# Altium PCB PCB2.PcbDoc
Units mil, origin at the board's own origin, x right, y up, seen from the top; angles counter-clockwise.
Board outline 3210 x 3525 mil, 2 copper layers (SIG, GND); 28 components, 20 nets, 73 pads, 15 vias.
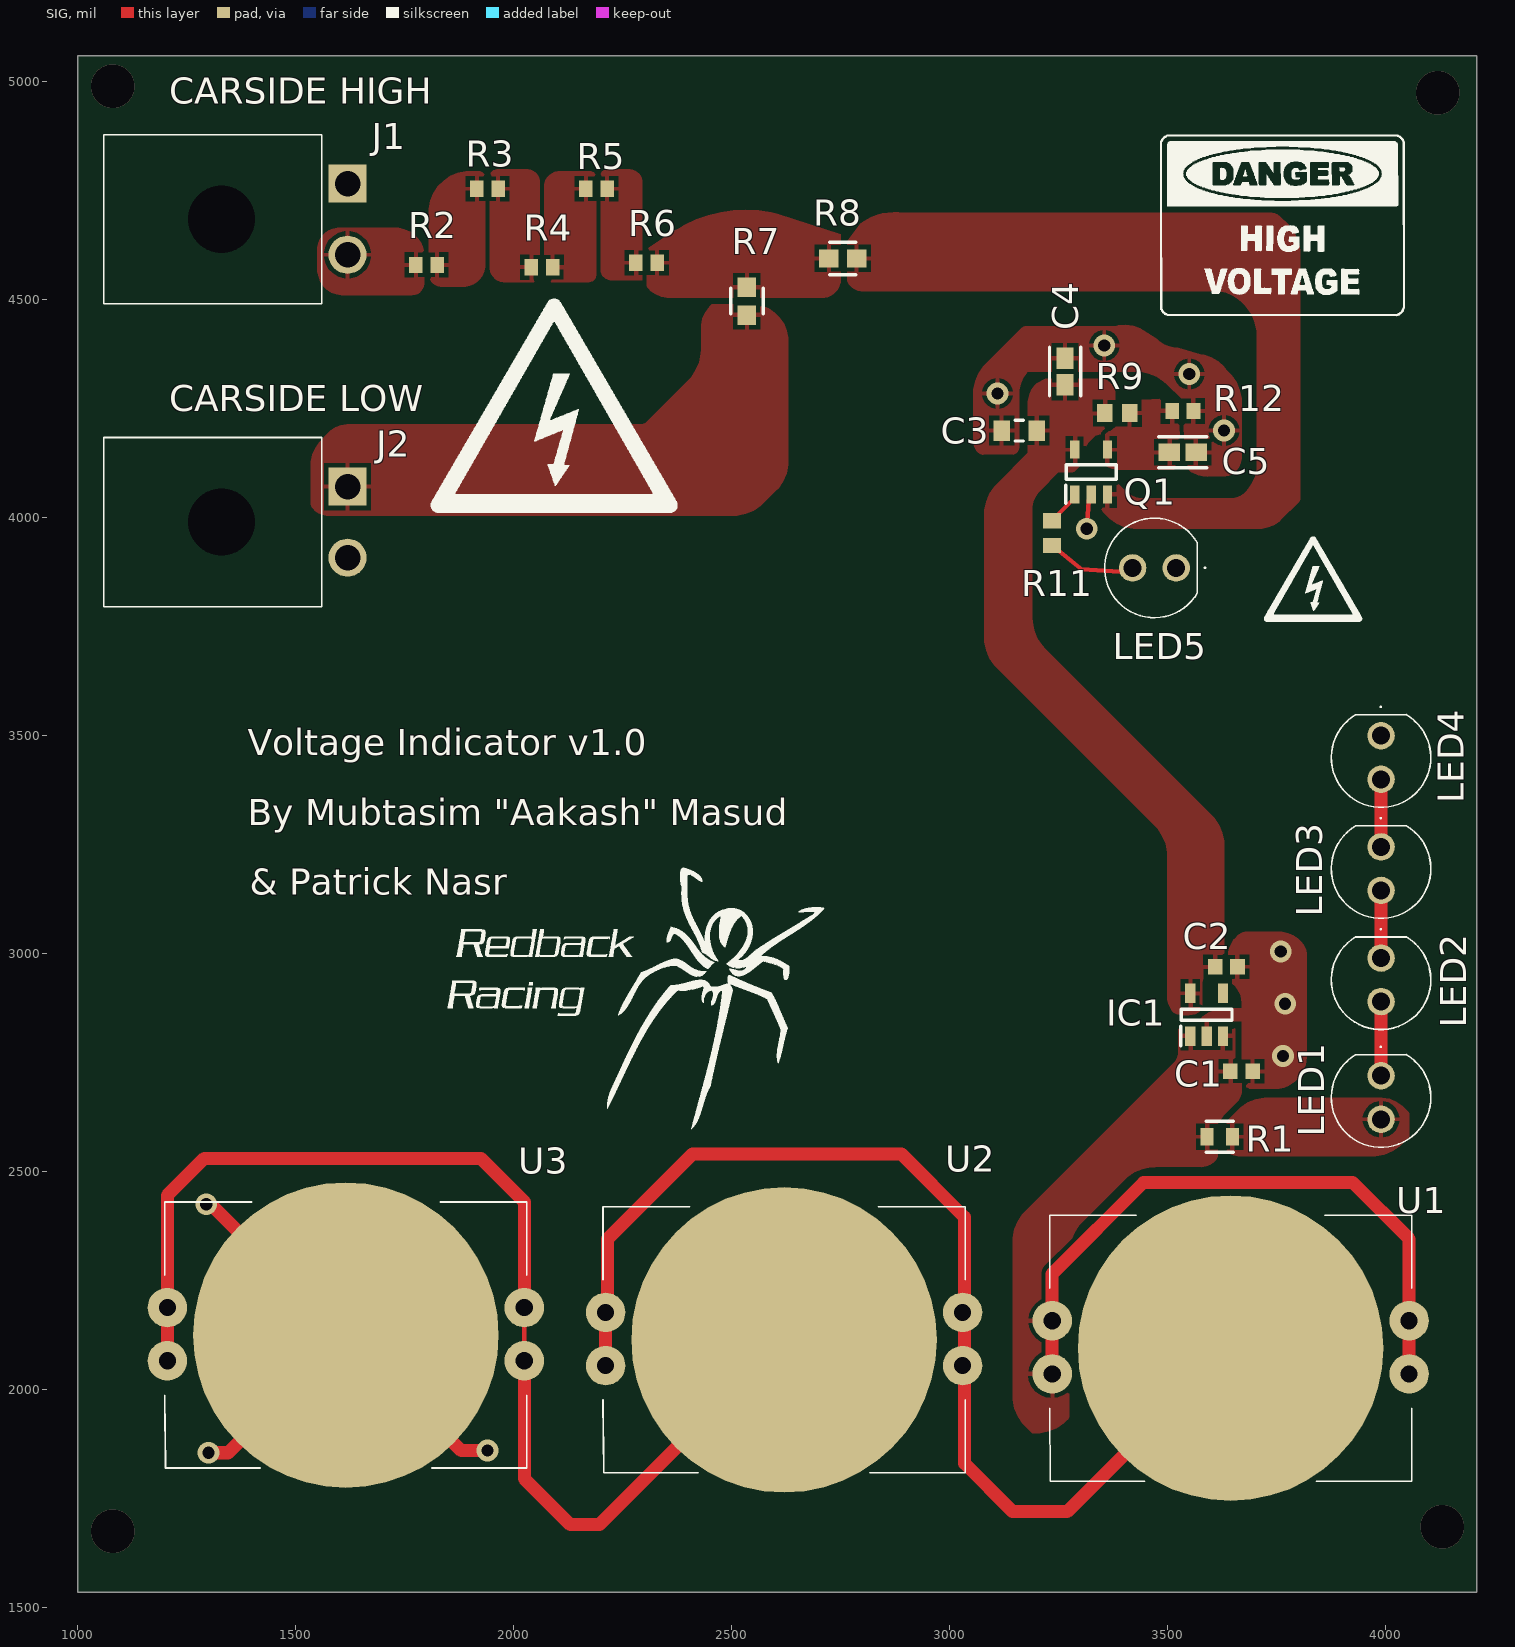
[diagram p0: SIG view]
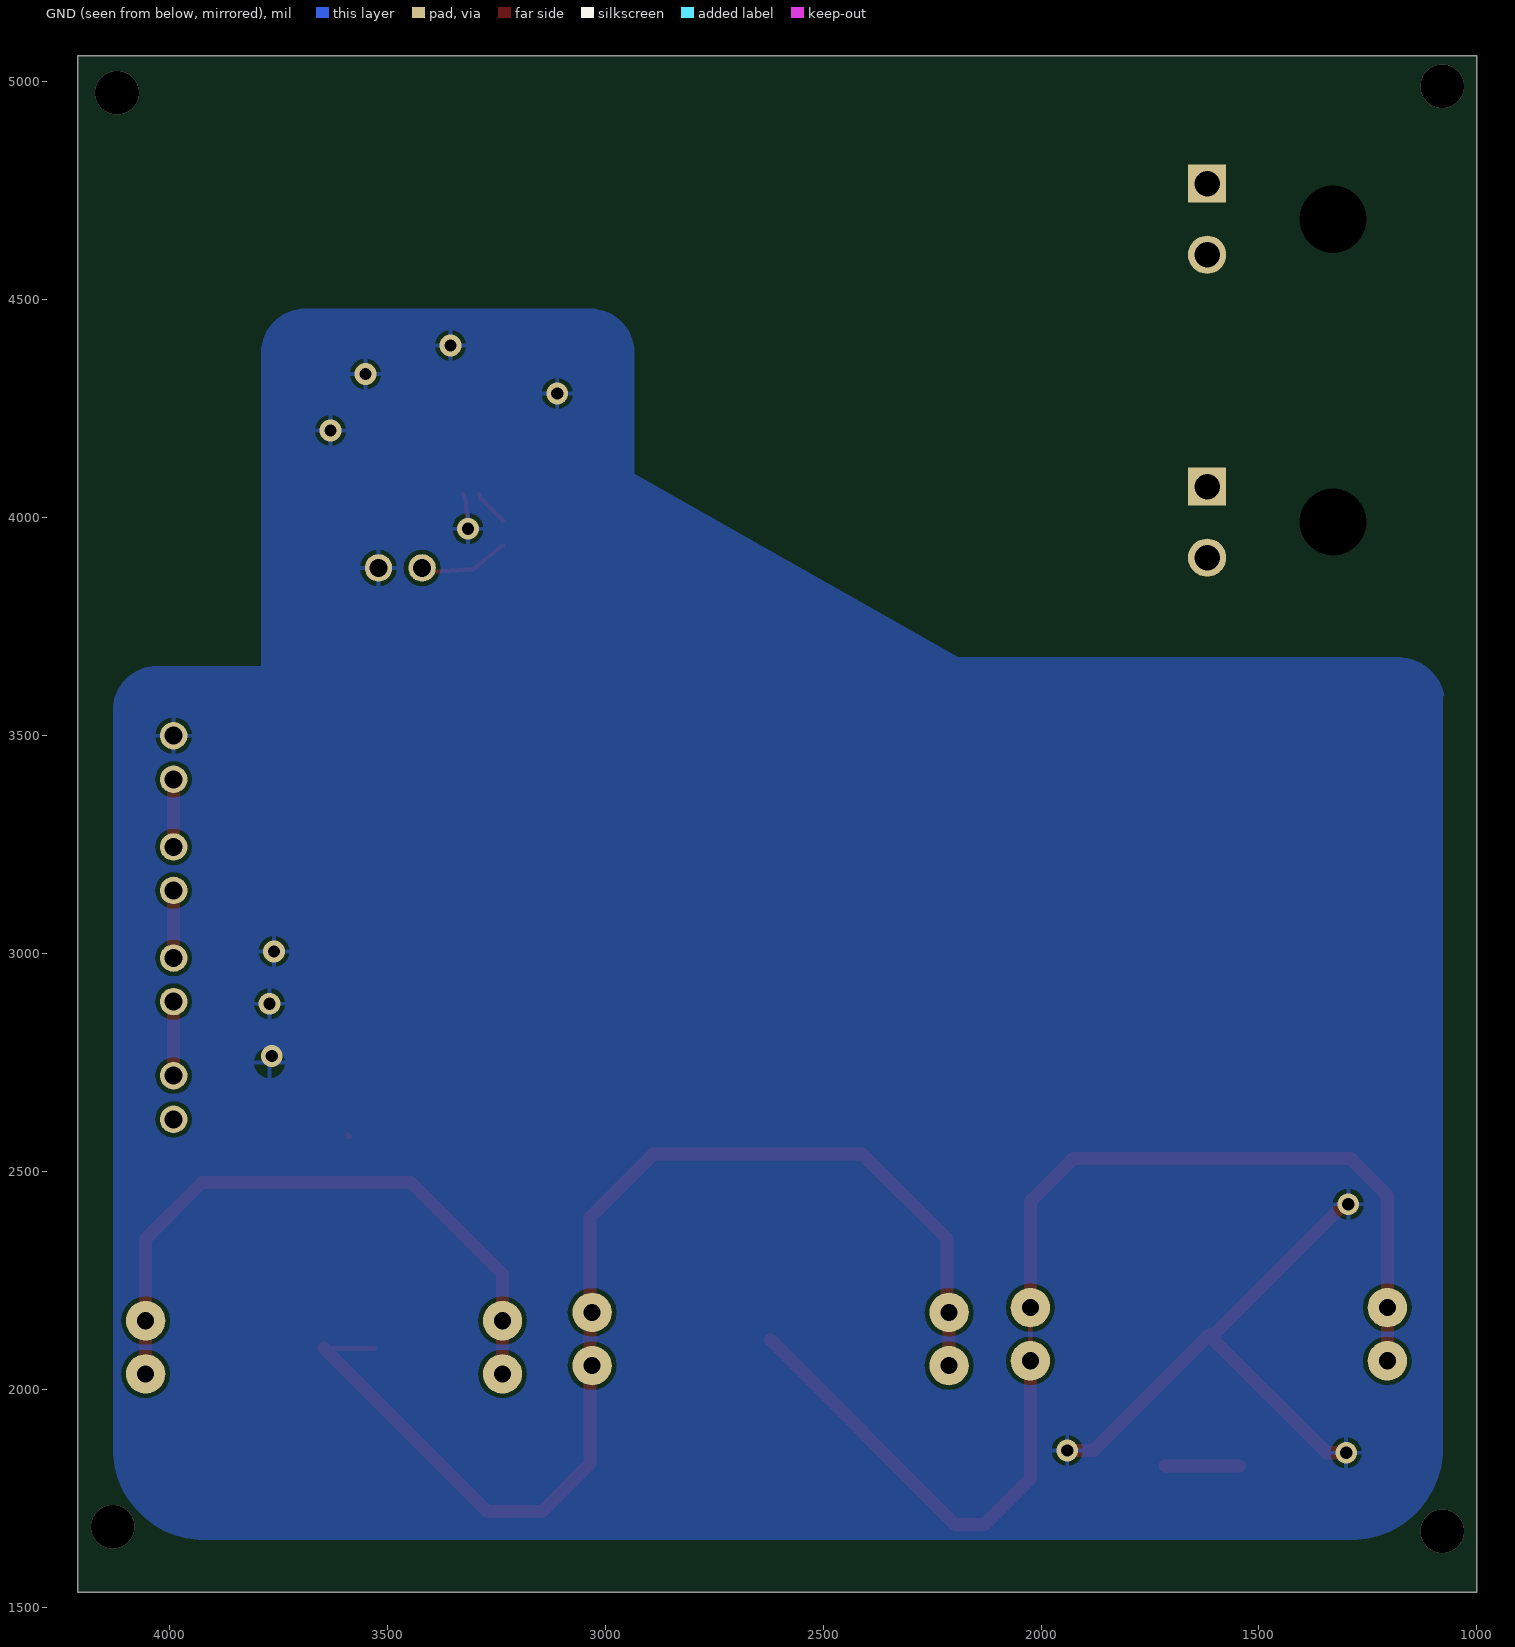
[diagram p1: GND view, seen from below]

## Layer stack, top to bottom
Top Solder: solder mask 0.4, Solder Resist, Dk 3.5
SIG: signal copper 1.4
Dielectric 1: dielectric 12.6, FR-4, Dk 4.8
GND: signal copper 1.4
Bottom Solder: solder mask 0.4, Solder Resist, Dk 3.5

## Board outline
1000,1535 4210,1535 4210,5060 1000,5060

## Design rules (kind name [scope] priority, off if disabled: settings)
Clearance [All] p1: gap=10 ignorepadtopadclearanceinfootprint=FALSE except(0: Arc-Hole Track-Hole SMDPad-Hole THPad-Hole Via-Hole Fill-Hole Poly-Hole Region-Hole Text-Hole)
PolygonConnect [All] p1: connectstyle=Relief reliefconductorwidth=10 reliefentries=4 polygonreliefangle="90 Angle" airgapwidth=10
RoutingVias [All] p1: holewidth=28 width=50 viastyle="Through Hole" minholewidth=28 minwidth=50 maxholewidth=28 maxwidth=50
SolderMaskExpansion [All] p1: expansion=4 istentingtop=FALSE
Width [All] p1: maxlimit=30 minlimit=10 preferedwidth=10
30 further rules are at their usual default settings.

## Components (designator, comment, footprint, x,y, rotation, side; value= is the part's Value field where it differs from the comment)
C1 "1uF" CAPC1608X90X35LL15T15 3670,2730 r180 top
C2 "1uF" CAPC1608X90X35LL15T15 3635,2970 r180 top
C3 "" FP-CGA3E-0_3-0_1-IPC_A 3160,4200 r0 top
C4 "" FP-0603-L_1_6_0_1-W_0_8_0-IPC_A 3265,4335.6 r270 top
C5 "" FP-0603-L_1_6_0_1-W_0_8_0-IPC_A 3535,4150 r0 top
IC1 "LD2980CM50TR" SOT95P280X145-5N 3590,2860 r90 top
J1 "1-770966-1" 17709661 1618.98,4766.5 r270 top
J2 "1-770966-1" 17709661 1618.98,4071.5 r270 top
LED1 "" C503B-BCN 3990,2670 r90 top
LED2 "" C503B-BCN 3990,2940 r90 top
LED3 "" C503B-BCN 3990,3195 r90 top
LED4 "" C503B-BCN 3990,3450 r90 top
LED5 "red led" C503B-BCN 3470,3885 r0 top
Q1 "LT1716CS5#PBF" SOT95P280X100-5N 3325,4105 r90 top
R1 "680" FP-CRCW0603-e3-MFG 3620,2580 r180 top
R2 "120k" RESC1609X50X30NL10T20 1800,4580 r180 top
R3 "120k" RESC1609X50X30NL10T20 1940,4755 r180 top
R4 "120k" RESC1609X50X30NL10T20 2065,4575 r180 top
R5 "120k" RESC1609X50X30NL10T20 2190,4755 r180 top
R6 "120k" RESC1609X50X30NL10T20 2305,4585 r180 top
R7 "12k" FP-CRCW0603-e3-IPC_A 2535,4497.1 r90 top
R8 "12k" FP-CRCW0603-e3-IPC_A 2755,4595 r0 top
R9 "2k" RESC1608X55X30ML15T15 3385,4240 r0 top
R11 "680" RESC1608X55X30ML15T15 3235,3965 r90 top
R12 "CRCW06032K80FKEA" RESC1609X50X30NL10T20 3535.39,4245 r180 top
U1 "BAT-HLD-001-THM" BATHLD001THM 3645,2095 r180 top
U2 "BAT-HLD-001-THM" BATHLD001THM 2620.55,2114.06 r180 top
U3 "BAT-HLD-001-THM" BATHLD001THM 1615,2125 r180 top

## Footprints (in the part's own frame and the unit in brackets; to place one, negate y for a bottom-side part, rotate by r counter-clockwise, add the part's x,y. Pads: shape width x height; smd on the part's side, far side on the other; paste and mask are expansions set on the pad)
17709661 [mm]
  rect 2.22x2.22 hole 1.48: 1(0,0)
  round 2.22 hole 1.48: 2(4.14,0)
  round 1.955 hole 3.91 unplated: 3(2.07,-7.34)
  silkscreen extent -2.86,-14.2 7,-1.5, body extent -3.5,-14.33 7.65,0.38, height 7.63
BATHLD001THM [mm]
  round 2.3 hole 1: 1(-10.4,1.5) 2(-10.4,-1.6) 3(10.4,-1.6) 4(10.4,1.5)
  round 17.8 smd: 5(0,0)
  silkscreen extent -10.55,-7.75 10.55,7.75, body extent -10.54,-7.85 10.54,7.98, height 4.29
C503B-BCN [mm]
  round 1.6 hole 1.05: 1(1.27,0) 2(-1.27,0)
  silkscreen extent -2.9,-2.9 2.98,2.9
CAPC1608X90X35LL15T15 [mm] "Chip Capacitor, 2-Leads, Body 1.60x0.81mm, IPC High Density"
  rect 0.85x0.9 smd: 1(-0.65,0) 2(0.65,0)
  body extent -0.88,-0.48 0.87,0.48, height 0.9
FP-0603-L_1_6_0_1-W_0_8_0-IPC_A [mil]
  rect 49.52x39.85 smd paste+0 mask+0: 1(-30.6,0) 2(30.6,0)
  silkscreen extent -55,-36 55,36, body extent -75,-40 75,40, height 10
FP-CGA3E-0_3-0_1-IPC_A [mm]
  rect 0.956x1.206 smd paste+0 mask+0: 1(-1.025,0) 2(1.025,0)
  silkscreen extent -0.25,-0.6 0.25,0.6, body extent -2,-1.1 2,1.1, height 0.25
FP-CRCW0603-e3-IPC_A [mil]
  rect 44.69x41.82 smd paste+0 mask+0: 1(-32.1,0) 2(32.1,0)
  silkscreen extent -30,-37 30,37, body extent -74,-41 74,41, height 10
FP-CRCW0603-e3-MFG [mm]
  rect 0.75x1 smd paste+0 mask+0: 1(-0.75,0) 2(0.75,0)
  silkscreen extent -0.8,-0.9 0.8,0.9, body extent -1.22,-0.6 1.22,0.6, height 0.25
RESC1608X55X30ML15T15 [mm] "Chip Resistor, 2-Leads, Body 1.60x0.80mm, IPC Low Density"
  rect 0.9x1.05 smd: 1(-0.725,0) 2(0.725,0)
  body extent -0.87,-0.48 0.87,0.48, height 0.55
RESC1609X50X30NL10T20 [mm] "Chip Resistor, 2-Leads, Body 1.55x0.85mm, IPC Medium Density"
  rect 0.8x0.95 smd: 1(-0.625,0) 2(0.625,0)
  body extent -0.82,-0.48 0.82,0.48, height 0.5
SOT95P280X100-5N [mm]
  rect 1.05x0.55 smd: 1(-1.3,0.95) 2(-1.3,0) 3(-1.3,-0.95) 4(1.3,-0.95) 5(1.3,0.95)
  silkscreen extent -1.83,-1.45 0.43,1.48, body extent -1.4,-1.45 1.4,1.45, height 1
SOT95P280X145-5N [mm]
  rect 1.15x0.6 smd: 1(-1.25,0.95) 2(-1.25,0) 3(-1.25,-0.95) 4(1.25,-0.95) 5(1.25,0.95)
  silkscreen extent -1.83,-1.48 0.33,1.5, body extent -1.4,-1.48 1.4,1.48, height 1.45

## Part data
C1 C2: library part CMP-2006-02298-2, Manufacturer=Kemet, Part Number=C0603C105K4RACTU
C3: library part CMP-2000-07546-2, "Cap Ceramic 100nF 50V X7R 10% Pad SMD 0603 +125°C Automotive T/R", Capacitance=100nF, Case Code (Imperial)=0603, Case Code (Metric)=1608, Dielectric=X7R, Max Operating Temperature=125°C, Min Operating Temperature=-55°C, Package Quantity=1, Ratings=AEC-Q200, Tolerance=10%, Voltage=50V, Case/Package=0603, Composition=Ceramic, Depth=0.8mm, Height=0.8mm, Lead Free="Lead Free", Length=1.6mm, Mount="Surface Mount", Packaging="Tape and Reel", Radiation Hardening=No, REACH SVHC="No SVHC", Termination=SMD/SMT, Thickness=0.035inch, Voltage Rating=50V, Voltage Rating (DC)=50V, Weight=7.1E-05oz, Width=0.8mm
C4 C5: library part CMP-2000-05447-3, "None", Capacitance=1uF, Case Code (Imperial)=0603, Case Code (Metric)=1608, Dielectric=X5R, Max Operating Temperature=85°C, Min Operating Temperature=-55°C, Package Quantity=1, Tolerance=10%, Voltage Rating=50V, Case/Package=0603, Construction=Flat, Contact Plating=Nickel, Depth=0.8mm, Halogen Free="Halogen Free", Height=0.8mm, Length=1.6mm, Mount="Surface Mount", Number of Pins=2, Packaging="Tape and Reel", Radiation Hardening=No, RoHS Compliant=Yes, Series=M, Termination=SMD/SMT, Thickness=0.035inch, Voltage Rating (DC)=50V, Width=0.031inch
IC1: "Integrated Circuit", Manufacturer_Name=STMicroelectronics, Mouser Part Number=511-LD2980CM50, Arrow Part Number=LD2980CM50TR, Arrow Price/Stock=https://www.arrow.com/en/products/ld2980cm50tr/stmicroelectronics?region=nac, Datasheet Link=http://www.st.com/st-web-ui/static/active/en/resource/technical/document/datasheet/CD00001636.pdf, Height=1.45mm, Manufacturer_Part_Number=LD2980CM50TR, Mouser Price/Stock=https://www.mouser.co.uk/ProductDetail/STMicroelectronics/LD2980CM50TR?qs=fUp1KqWiDeH%252BLPcpxdfyeg%3D%3D
J1 J2: "Connector", Manufacturer_Name="TE Connectivity", Mouser Part Number=571-1-770966-1, Arrow Part Number=1-770966-1, Arrow Price/Stock=https://www.arrow.com/en/products/1-770966-1/te-connectivity?region=europe, Datasheet Link=https://www.te.com/commerce/DocumentDelivery/DDEController?Action=showdoc&DocId=Customer+Drawing%7F770966%7FG1%7Fpdf%7FEnglish%7FENG_CD_770966_G1.pdf%7F1-770966-1, Height=7.77mm, Manufacturer_Part_Number=1-770966-1, Mouser Price/Stock=https://www.mouser.co.uk/ProductDetail/TE-Connectivity-AMP/1-770966-1?qs=zthB9rB9njD9XGaVaokK%2Fw%3D%3D
LED1 LED2 LED3 LED4 LED5: library part C503B-GAS-CB0F0792, "LED", Manufacturer_Name=Wolfspeed, Mouser Part Number=941-C503BGASCB0F0792, Arrow Part Number=C503B-GAS-CB0F0792, Arrow Price/Stock=https://www.arrow.com/en/products/c503b-gas-cb0f0792/cree, Datasheet Link=https://www.cree.com/led-components/media/documents/1300-C503B-BAS-BAN-GAS-GAN.pdf, Manufacturer_Part_Number=C503B-GAS-CB0F0792, Mouser Price/Stock=https://www.mouser.com/Search/Refine.aspx?Keyword=941-C503BGASCB0F0792
Q1: "Transistor", Manufacturer_Name="Analog Devices", Mouser Part Number=584-LT1716CS5#PBF, Datasheet Link=https://g.componentsearchengine.com/Datasheets/2/LT1716CS5#PBF.pdf, Height=1mm, Manufacturer_Part_Number=LT1716CS5#PBF, Mouser Price/Stock=https://www.mouser.com/Search/Refine.aspx?Keyword=584-LT1716CS5%23PBF
R1: library part CMP-2000-03529-2, "RES Thick Film, 680Ω, 1%, 0.1W, 100ppm/°C, 0603", Case Code (Imperial)=0603, Case Code (Metric)=1608, Max Operating Temperature=155°C, Max Power Dissipation=100mW, Min Operating Temperature=-55°C, Package Quantity=10, Resistance=680R, Temperature Coefficient=100ppm/°C, Tolerance=1%, Voltage Rating=75V, Case/Package=0603, Composition="Thick Film", Contact Plating=Tin, Depth=0.85mm, Features="Automotive AEC-Q200", Height=0.45mm, Lead Free="Lead Free", Length=1.55mm, Military Standard=Not, Number of Pins=2, Number of Terminations=2, Packaging="Tape and Reel", Power Rating=100mW, Radiation Hardening=No, Termination=SMD/SMT, Voltage Rating (DC)=75V, Weight=7.1E-05oz, Width=0.85mm, Working Voltage=75V
R2 R3 R4 R5 R6: library part CMP-2000-03868-1, Manufacturer="Vishay Dale", Part Number=CRCW0603120KFKEA
R7 R8: library part CMP-2000-03877-2, "RES Thick Film, 12kΩ, 1%, 0.1W, 100ppm/°C, 0603", Case Code (Imperial)=0603, Case Code (Metric)=1608, Max Operating Temperature=155°C, Max Power Dissipation=100mW, Min Operating Temperature=-55°C, Package Quantity=10, Resistance=12kR, Temperature Coefficient=100ppm/°C, Tolerance=1%, Voltage Rating=75V, Case/Package=0603, Composition="Thick Film", Contact Plating=Tin, Depth=0.85mm, Features="Automotive AEC-Q200", Height=0.45mm, Lead Free="Lead Free", Length=1.55mm, Military Standard=Not, Mount="Surface Mount", Number of Terminations=2, Packaging="Tape and Reel", Power Rating=100mW, Radiation Hardening=No, Termination=SMD/SMT, Voltage Rating (DC)=75V, Weight=7.1E-05oz, Width=0.033inch
R9 R11: library part CMP-2000-00317-1, Manufacturer=Panasonic, Part Number=ERJ-3EKF2001V
R12: library part CMP-2000-03186-1, Manufacturer="Vishay Dale", Part Number=CRCW06032K80FKEA
U1 U2 U3: "Undefined or Miscellaneous", Manufacturer_Name="Linx Technologies", Height=4.2mm, Manufacturer_Part_Number=BAT-HLD-001-THM

## Via types
v1: diameter 50, hole 28, SIG to GND, 11 vias
v2: diameter 100, hole 100, SIG to GND, 4 vias

## Nets (pads, with @x,y where several pads share a name; then routed paths per layer and width w, separated by ;. In a path a pad name is that pad's centre, name@x,y a point inside that pad or via, vN(x,y) a via of type N, cw(c..) or ccw(c..) an arc to the next point about the centre after c; other vN are vias at no path point)
5V: C2.2 C3.2 C4.2 IC1.5 Q1.5 R9.1
CSH: J1.2 R2.2
GND: C1.1 C2.1 C3.1 C4.1 C5.2 IC1.2 LED4.1 LED5.1 Q1.2 R12.1 U3.5 | length 1555.9
  SIG w10: v1(1295,2425) v1@1305,2425 ; U3.5@1605,2125 U3.5 ; v1(3315,3975) 3319.17,4038.15 Q1.2
  SIG w30: v1(1300,1855) 1345,1855 U3.5 1880,1860 v1(1940,1860) ; v1@1305,2425 U3.5@1605,2125 ; U3.5@1545,1825 U3.5@1715,1825
  other v1: 3765,2765 3770,2885 3760,3005 3630,4200 3110,4285 3550,4330 3355,4395
NetC1_2: C1.2 IC1.1 IC1.3 R1.2 U1.1 U1.2 U1.3 U1.4 | length 1522.8
  SIG w10: U1.4@3235,2030 3235,2035.39 U1.4 ; R1.2@3585.55,2580 3590.47,2584.92 R1.2 ; U1.1@4050,2031.5 U1.1
  SIG w30: U1.4 U1.3 3235.55,2265.55 3445,2475 3925,2475 4054.45,2345.55 U1.2 U1.1
NetC5_1: C5.1 Q1.4 R9.2 R12.2
NetJ2_1: J2.1 R7.1
NetLED1_1: LED1.1 LED2.2 | length 178.4
  SIG w10: LED1.1@3987.5,2722.5 LED1.1 ; LED2.2@3987.5,2887.5 3985,2890 cw(c3972.93,2877.93) LED2.2@3990,2877.93
  SIG w30: LED1.1 LED2.2@3990,2877.93
NetLED1_2: LED1.2 R1.1
NetLED2_1: LED2.1 LED3.2 | length 155
  SIG w30: LED2.1 LED3.2
NetLED3_1: LED3.1 LED4.2 | length 155
  SIG w30: LED3.1 LED4.2
NetLED5_2: LED5.2 R11.1 | length 193.8
  SIG w10: R11.1 3299.86,3883.82 3302.35,3881.8 3392.12,3876.38 LED5.2@3392.42,3876.38 ; LED5.2@3392.43,3876.38 3396.22,3876.38 3399.06,3878.9 LED5.2@3405.94,3885
NetQ1_1: Q1.1 R11.2 | length 81.3
  SIG w10: R11.2 3282.17,4040.71 ccw(c3269.06,4053.82) Q1.1
NetQ1_3: Q1.3 R8.2
NetR2_1: R2.1 R3.2
NetR3_1: R3.1 R4.2
NetR4_1: R4.1 R5.2
NetR5_1: R5.1 R6.2
NetR6_1: R6.1 R7.2 R8.1
NetU1_5: U1.5 U2.1 U2.2 U2.3 U2.4 | length 2732.3
  SIG w10: U1.5@3528.26,2095 U1.5
  SIG w30: U2.4 U2.3 ; U2.3@2215.55,2187.99 2215.55,2345.55 2410,2540 2890,2540 3034.45,2395.55 3034.45,2177.05 3034.45,2055 3034.45,1830.55 3145,1720 3270,1720 U1.5
NetU2_5: U2.5 U3.1 U3.2 U3.3 U3.4 | length 2725.5
  SIG w10: U3.1 U3.2
  SIG w30: U3.4 U3.3 1205.55,2445.55 1290.39,2530.39 1924.61,2530.39 2024.45,2430.55 U3.2 ; U3.1 2024.45,1795.55 2130,1690 2196.5,1690 U2.5
pads on no net: IC1.4 J1.1 J1.3 J2.2 J2.3
copper on no net:
  other v2: 1080,1675 4130,1685 4120,4975 1080,4990

## Polygon pours and split planes (outlines as drawn)
5V on SIG (solid, pour order 61): 3080,3725.56 ccw(c3180,3725.56) 3109.29,3654.85 3470.71,3293.43 cw(c3400.02,3222.73) 3500,3222.72 3500,2900.36 ccw(c3551.21,2900.35) 3515,2864.14 3514.85,2864.29 ccw(c3542.61,2930.79) 3570,2864.14 ccw(c3555.87,2884.13) 3580,2880 3580,2935 cw(c3597.07,2927.93) 3590,2945 3619.14,2944.14 ccw(c3621.04,2965.78) 3635,2949.14 3635,2977.07 ccw(c3617.95,2977.08) 3630,2989.14 3630,3247.72 ccw(c3530.02,3247.73) 3600.71,3318.43 3219.29,3699.85 cw(c3290,3770.56) 3190,3770.56 3190,4019.14 cw(c3250.35,4019.14) 3207.68,4061.82 3250,4104.14 3277.93,4104.14 ccw(c3277.93,4121.21) 3290,4109.14 3295.86,4115 ccw(c3261.72,4149.14) 3310,4149.14 cw(c3346.21,4149.14) 3320.61,4174.75 3335,4189.14 ccw(c3335,4225.36) 3360.61,4199.75 3375,4214.14 ccw(c3362.94,4226.21) 3380,4226.21 3380,4285 ccw(c3345.88,4285.01) 3370,4309.14 ccw(c3345.87,4285.03) 3345.86,4319.14 3220,4319.14 3200,4309.14 ccw(c3248.27,4260.86) 3180,4260.86 3180,4149.14 3109.29,4078.43 ccw(c3179.99,4007.73) 3080,4007.72
NetLED1_2 on SIG "NETLED1_2_L01_P056" (solid, pour order 56): 3625,2605 3660.71,2640.71 cw(c3731.42,2570) 3731.42,2670 3985,2670 cw(c3985,2585.5) 4044.75,2645.25 4050,2640 cw(c4037.93,2627.93) 4055,2627.93 4055,2580 4039.29,2564.29 cw(c3968.58,2635) 3968.58,2535 3666.21,2535 cw(c3666.21,2586.21) 3630,2550 cw(c3642.07,2562.07) 3625,2562.07
GND on SIG (solid, pour order 55): 3670,2711.04 ccw(c3684.57,2711.04) 3674.27,2700.73 3680,2695 ccw(c3692.07,2707.07) 3692.07,2690 3750,2690 ccw(c3750,2750.35) 3792.68,2707.68 3795,2710 ccw(c3734.65,2770.35) 3820,2770.36 3820,2993.79 ccw(c3768.79,2993.79) 3805,3030 ccw(c3756.72,2981.72) 3756.72,3050 3680,3050 ccw(c3680,3025.86) 3662.93,3042.93 3655,3035 ccw(c3691.21,2998.79) 3640,2998.79 3640,2947.07 ccw(c3657.07,2947.07) 3645,2935 3655,2925 cw(c3618.79,2888.79) 3670,2888.79 3670,2875 3635.36,2875 ccw(c3635.35,2789.65) 3575,2850 ccw(c3587.07,2837.93) 3570,2837.93 3570,2793.91 ccw(c3588.37,2793.91) 3575.38,2780.92 ccw(c3577.6,2783.14) 3577.6,2780 3605,2780 ccw(c3592.93,2792.07) 3610,2792.07 3610,2829.49 cw(c3621.27,2829.49) 3613.3,2837.46 cw(c3626.99,2830.83) 3632.5,2845 3670,2845
NetC1_2 on SIG (solid, pour order 48): 3145,1986.42 ccw(c3245,1986.42) 3174.29,1915.71 3190,1900 3198.58,1900 ccw(c3198.58,2000) 3269.29,1929.29 3270,1930 ccw(c3257.93,1942.07) 3275,1942.07 3275,2313.58 cw(c3375,2313.58) 3304.29,2384.29 3400.71,2480.71 cw(c3471.42,2410) 3471.42,2510 3573.79,2510 ccw(c3573.79,2561.21) 3610,2525 ccw(c3597.93,2537.07) 3615,2537.07 3615,2593.79 cw(c3666.21,2593.79) 3630,2630 3660,2660 ccw(c3635.86,2684.14) 3670,2684.14 3670,2737.93 ccw(c3652.93,2737.93) 3665,2750 ccw(c3652.93,2737.93) 3654.95,2754.88 ccw(c3629.42,2765.58) 3655,2755 3655,2830 ccw(c3631.93,2825.46) 3645,2845 3620,2845 ccw(c3635.61,2824.39) 3610,2827.93 3610,2790 cw(c3597.94,2790) 3606.46,2781.46 3605,2780 3580,2780 cw(c3580,2792.07) 3571.46,2783.54 3570,2785 3570,2822.93 ccw(c3546.94,2825.45) 3565,2840 ccw(c3553.98,2830.45) 3555,2845 3545,2845 ccw(c3542.97,2823.05) 3528.87,2840 3525,2830 3525,2775 cw(c3488.79,2775) 3525,2775 ccw(c3566.22,2772.07) 3524.9,2772.27 cw(c3488.79,2775) 3514.39,2749.39 3174.29,2409.29 ccw(c3245,2338.58) 3145,2338.58
NetQ1_3 on SIG "NETQ1_3_L01_P042" (solid, pour order 42): 2765,4635 2765,4550 ccw(c2789.14,4550) 2772.07,4532.93 2775,4530 ccw(c2799.14,4554.14) 2799.14,4520 3609.64,4520 cw(c3609.65,4434.65) 3670,4495 3675.71,4489.29 cw(c3605,4418.58) 3705,4418.58 3705,4120.36 cw(c3619.65,4120.35) 3680,4060 cw(c3643.79,4096.21) 3643.79,4045 3445,4045 cw(c3445,4105.36) 3402.32,4062.68 3380,4085 ccw(c3367.93,4072.93) 3367.93,4090 3350,4090 ccw(c3362.07,4077.93) 3345,4077.93 3345,4034.14 ccw(c3379.14,4034.14) 3355,4010 3360.71,4004.29 ccw(c3431.42,4075) 3431.42,3975 3710,3975 ccw(c3710,4047.43) 3761.21,3996.21 3800,4035 ccw(c3787.93,4047.07) 3805,4047.07 3805,4603.58 ccw(c3705,4603.58) 3775.71,4674.29 3760,4690 ccw(c3735.86,4665.86) 3735.86,4700 2890,4700 ccw(c2873.53,4572.48) 2795,4674.29
NetR6_1 on SIG "NETR6_1_L01_P016" (solid, pour order 16): 2310,4620 ccw(c2322.06,4607.93) 2305,4607.93 2305,4537.07 ccw(c2322.07,4537.07) 2310,4525 ccw(c2358.28,4573.28) 2358.28,4505 2710,4505 ccw(c2710,4541.21) 2735.61,4515.61 2740,4520 ccw(c2715.87,4544.13) 2750,4544.14 2750,4650 2605,4697.07 ccw(c2531.65,4409.61) 2380.17,4664.69 2370,4660
NetJ2_1 on SIG "NETJ2_1_L01_P037" (solid, pour order 37): 2544.64,4490 cw(c2544.64,4404.64) 2605,4465 cw(c2544.64,4404.64) 2630,4404.64 2630,4131.42 cw(c2530,4131.42) 2600.71,4060.71 2574.29,4034.29 cw(c2503.58,4105) 2503.58,4005 1575,4005 cw(c1575,4053.28) 1540.86,4019.14 1540,4020 cw(c1552.07,4032.07) 1535,4032.07 1535,4120 cw(c1619.5,4120) 1559.75,4179.75 1575,4195 cw(c1623.28,4146.72) 1623.28,4215 2292.93,4215 ccw(c2292.93,4232.07) 2305,4220 2400.71,4315.71 ccw(c2330,4386.42) 2430,4386.42 2430,4435 cw(c2502.43,4435) 2451.21,4486.21 2455,4490
NetR5_1 on SIG "NETR5_1_L01_P030" (solid, pour order 30): 2200,4570 ccw(c2225,4570) 2225,4545 2295,4545 2295,4770 ccw(c2265,4770) 2265,4800 2215,4800 ccw(c2215,4785) 2200,4785
NetR4_1 on SIG "NETR4_1_L01_P029" (solid, pour order 29): 2065,4595 2065,4565 ccw(c2090,4565) 2090,4540 2170,4540 ccw(c2170,4560) 2190,4560 2190,4780 ccw(c2175,4780) 2175,4795 2105,4795 ccw(c2105,4760) 2070,4760 2070,4750
NetR3_1 on SIG "NETR3_1_L01_P028" (solid, pour order 28): 1945,4575 ccw(c1980,4575) 1980,4540 2045,4540 ccw(c2045,4555) 2060,4555 2060,4770 ccw(c2030,4770) 2030,4800 1965,4800 ccw(c1965,4780) 1945,4780
NetR2_1 on SIG "NETR2_1_L01_P025" (solid, pour order 25): 1805,4700 cw(c1900,4700) 1900,4795 1920,4795 cw(c1920,4780) 1935,4780 1935,4580 cw(c1885,4580) 1885,4530 1835,4530 cw(c1835,4560) 1805,4560
CSH on SIG "CSH_L01_P024" (solid, pour order 24): 1550,4615 cw(c1600,4615) 1600,4665 1730,4665 cw(c1730,4600) 1795,4600 1795,4540 cw(c1765,4540) 1765,4510 1610,4510 cw(c1610,4570) 1550,4570
GND on SIG "GND_L01_P009" (solid, pour order 9): 3540,4120 3555,4105 ccw(c3591.31,4163.48) 3598.28,4095 3630.86,4095 ccw(c3630.87,4129.11) 3655,4105 ccw(c3618.81,4141.2) 3670,4141.21 3670,4263.58 ccw(c3570.01,4263.58) 3640.71,4334.29 3635,4340 ccw(c3562.75,4285.07) 3575,4375 3525,4390 cw(c3524.99,4460.68) 3475,4410.71 3445,4430 ccw(c3399.72,4354.82) 3378.58,4440 3177.07,4440 ccw(c3177.07,4422.93) 3165,4435 3084.29,4354.29 ccw(c3154.99,4283.58) 3055,4283.58 3055,4174.14 ccw(c3089.11,4174.13) 3065,4150 ccw(c3077.05,4162.03) 3077.07,4145 3145,4145 ccw(c3145.02,4157.03) 3153.54,4148.54 3155,4150 ccw(c3142.95,4162.06) 3160,4162.07 3160,4286.72 cw(c3228.24,4286.73) 3180,4335 3428.58,4335 cw(c3428.58,4235.01) 3499.29,4305.71 3535.01,4269.99
NetC5_1 on SIG "NETC5_1_L01_P007" (solid, pour order 7): 3530,4135 cw(c3505.86,4135) 3522.93,4117.93 3515,4110 3390,4110 cw(c3390,4170.33) 3347.32,4127.68 3347.32,4177.32 cw(c3385.99,4161.33) 3370,4200 3390,4215 cw(c3452.6,4219.73) 3415,4270 3515,4274.29 cw(c3499.21,4246.54) 3530,4255 3530,4185
GND on GND "GND-GND" (solid, pour order 36): 1078.72,1864.28 ccw(c1287.72,1864.27) 1287.72,1655.28 3919.72,1655.28 ccw(c3919.72,1864.28) 4128.72,1864.28 4128.72,3559.28 ccw(c4028.72,3559.28) 4028.72,3659.28 3788.72,3659.28 3788.72,4379.28 ccw(c3688.72,4379.28) 3688.72,4479.28 3033.72,4479.28 ccw(c3033.72,4379.28) 2933.72,4379.28 2933.72,4101.29 2190,3680 1181.22,3680 ccw(c1181.22,3571.78) 1073.72,3559.28 1073.72,3449.28 1078.72,3589.28

## Silkscreen, mask and mechanical layers (free items; w line width, h text height)
Top Overlay:
  drawing of 39 lines, arcs and shapes, not listed
  text "CARSIDE HIGH" at 1210,4950 h60
  text "CARSIDE LOW" at 1210,4245 h60
  text "Voltage Indicator v1.0" at 1390,3454.99 h60
  text "By Mubtasim \"Aakash\" Masud" at 1390,3294.99 h60
  text "& Patrick Nasr" at 1395,3135 h60